# Altium PCB um982.PcbDoc
Units mm, origin at the board's own origin, x right, y up, seen from the top; angles counter-clockwise.
Board outline 39.75 x 53.34 mm, 2 copper layers (Top Layer, Bottom Layer); 39 components, 39 nets, 222 pads, 0 vias.
Unrouted connection lines stored in the file: 60.
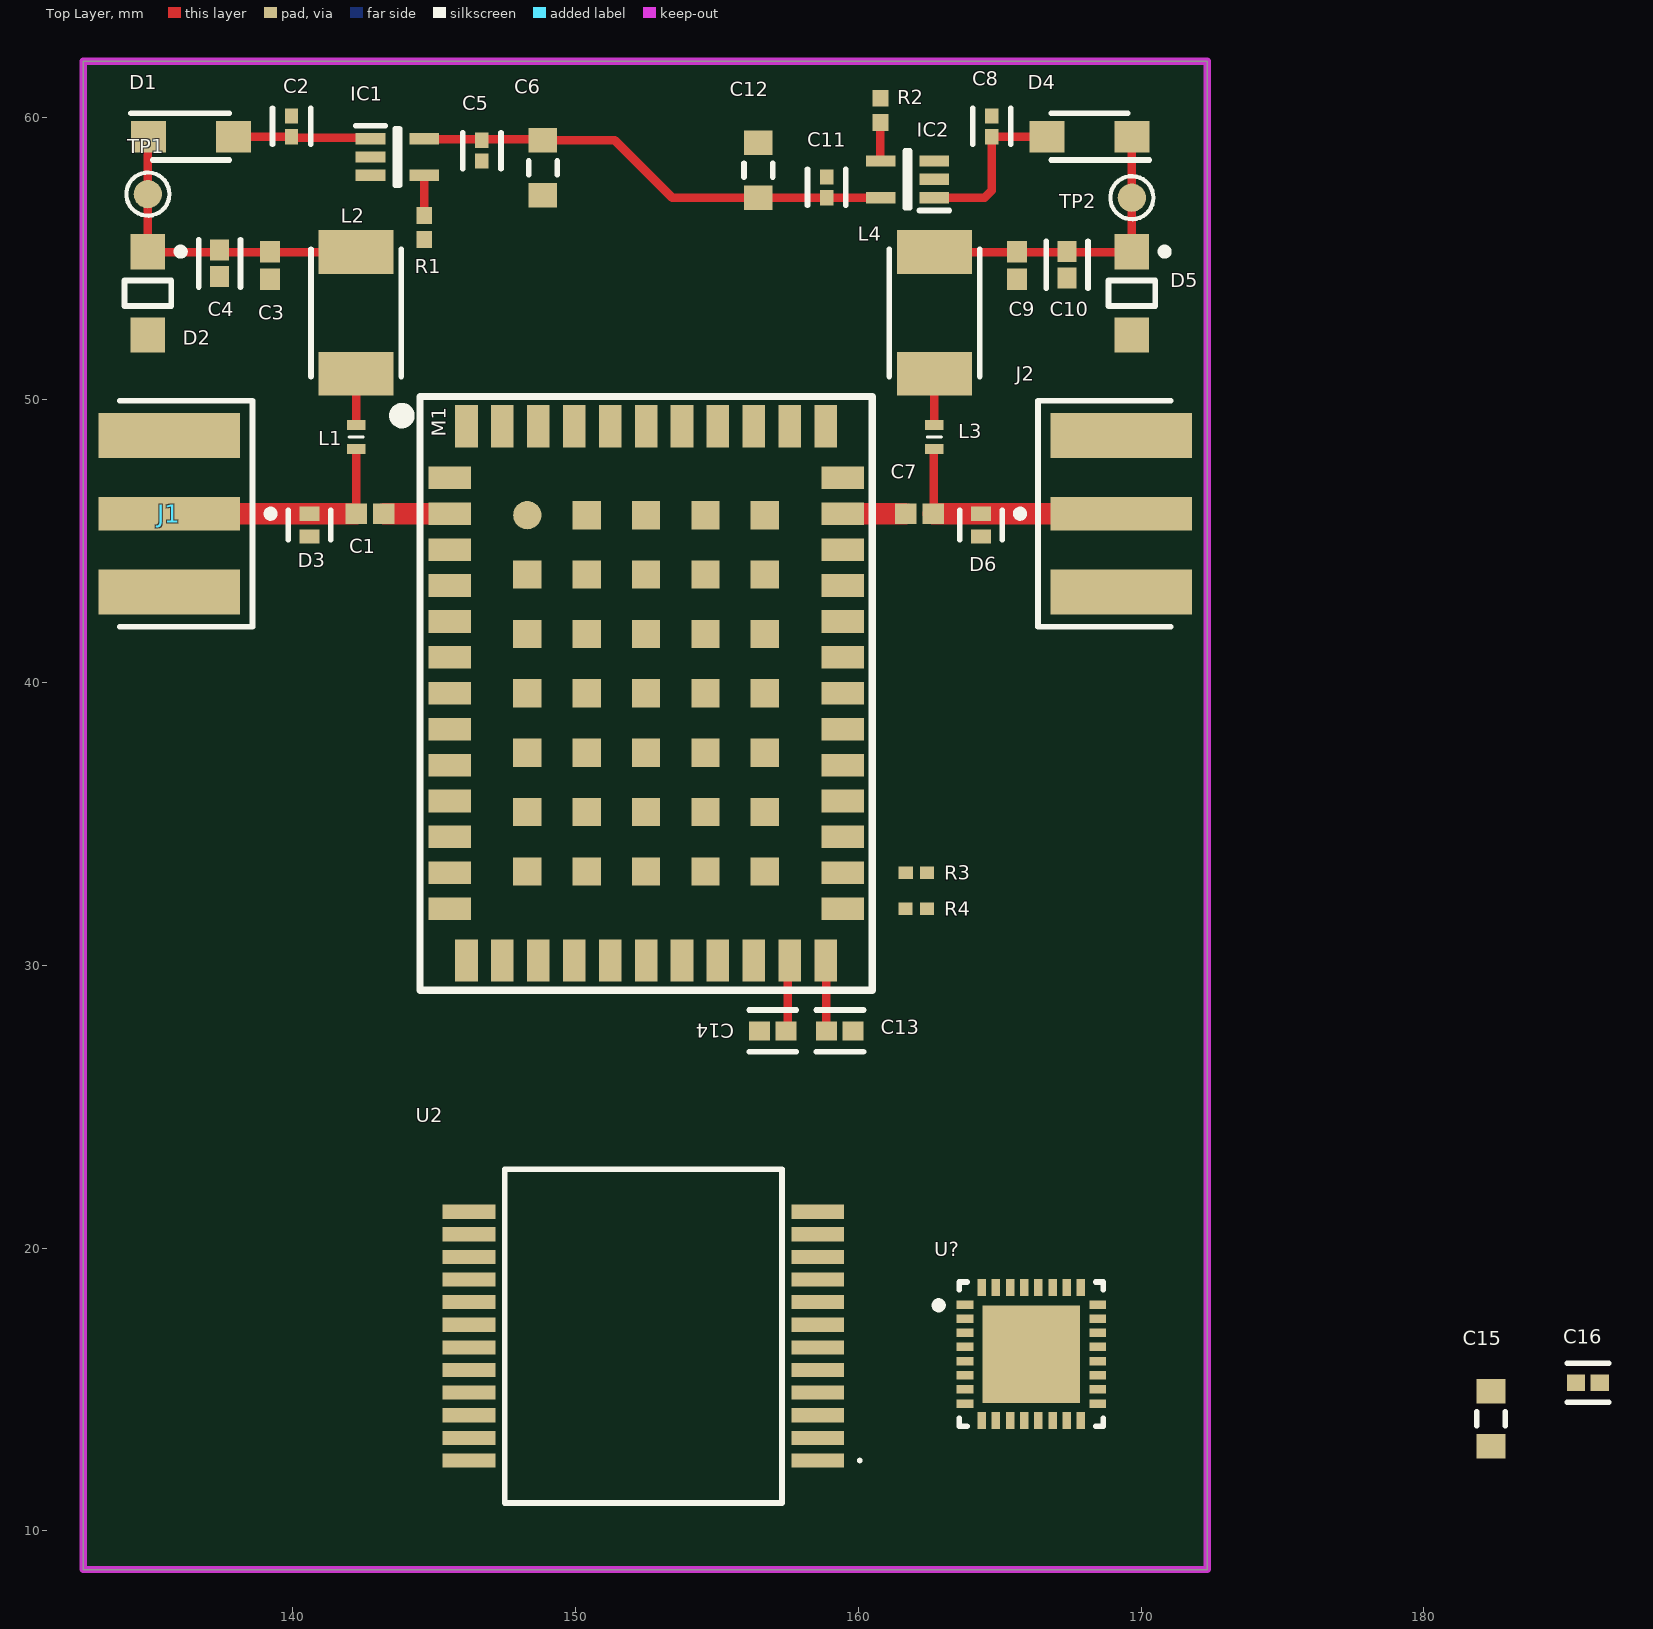
[diagram p0: Top Layer view]
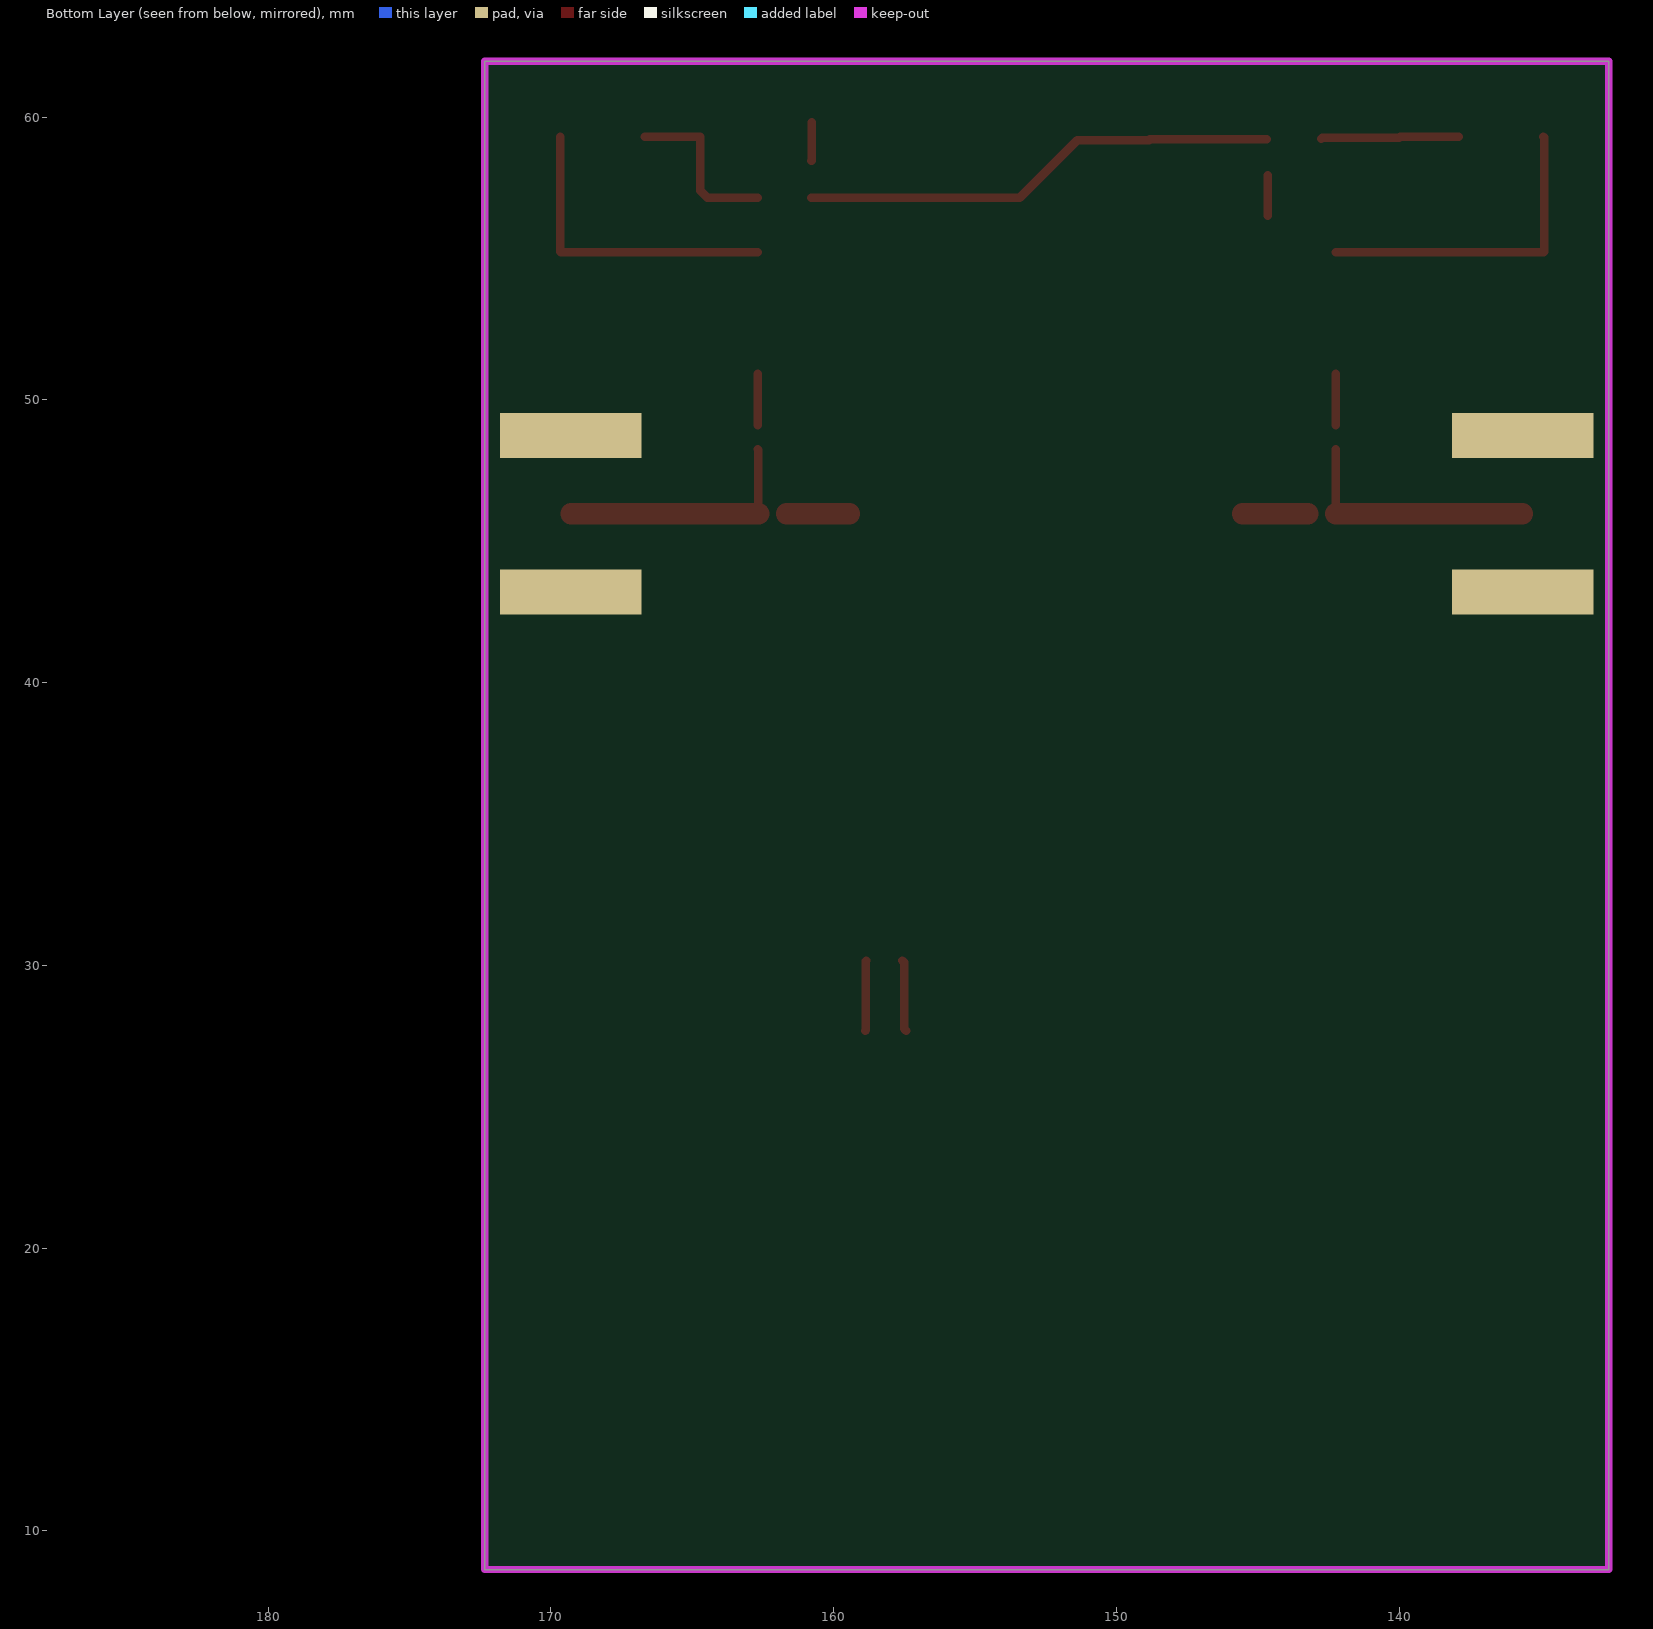
[diagram p1: Bottom Layer view, seen from below]

## Layer stack, top to bottom
Top Solder: solder mask 0.0102, Solder Resist, Dk 3.5
Top Layer: signal copper 0.0356
Dielectric 1: dielectric 0.32, FR-4, Dk 4.8
Bottom Layer: signal copper 0.0356
Bottom Solder: solder mask 0.0102, Solder Resist, Dk 3.5

## Board outline
132.588,8.636 172.339,8.636 172.339,61.976 132.588,61.976

## Design rules (kind name [scope] priority, off if disabled: settings)
Clearance [All] p1: gap=0.1 ignorepadtopadclearanceinfootprint=FALSE
PolygonConnect [All] p1: connectstyle=Relief reliefconductorwidth=0.254 reliefentries=4 polygonreliefangle="90 Angle" airgapwidth=0.254
RoutingVias [All] p1: holewidth=0.711 width=1.27 viastyle="Through Hole" minholewidth=0.711 minwidth=1.27 maxholewidth=0.711 maxwidth=1.27
SolderMaskExpansion [All] p1: expansion=0.102 istentingtop=FALSE
Width [All] p1: maxlimit=1 minlimit=0.2 preferedwidth=0.3
30 further rules are at their usual default settings.

## Classes and differential pairs
component class IMU: C15 C16 U2 U?
component class um982: C1 C2 C3 C4 C5 C6 C7 C8 C9 C10 C11 C12 C13 C14 D1 D2 D3 D4 D5 D6 IC1 IC2 J1 J2 L1 L2 L3 L4 M1 R1 R2 R3 R4 TP1 TP2

## Components (designator, comment, footprint, x,y, rotation, side; value= is the part's Value field where it differs from the comment)
C1 "GRM1555C1H101JA01D" CAPC1005X55X25ML05T10 142.73,45.974 r0 top value=100p
C2 "C1005X7R1H104K050BB" FP-C1005-050-0_05-IPC_C 139.954,59.676 r270 top value=100n
C3 "GRM1555C1H101JA01D" CAPC1005X55X25ML05T10 139.192,54.755 r270 top value=100p
C4 "C1005X7R1H104K050BB" FP-C1005-050-0_05-IPC_A 137.414,54.828 r90 top value=100n
C5 "C1005X7R1H104K050BB" FP-C1005-050-0_05-IPC_C 146.685,58.815 r90 top value=100n
C6 "C1608X5R1E106M080AC" FP-C1608-080-IPC_A 148.844,58.207 r270 top value=10u
C7 "GRM1555C1H101JA01D" CAPC1005X55X25ML05T10 162.161,45.974 r180 top value=100p
C8 "C1005X7R1H104K050BB" FP-C1005-050-0_05-IPC_C 164.719,59.676 r270 top value=100n
C9 "GRM1555C1H101JA01D" CAPC1005X55X25ML05T10 165.608,54.755 r270 top value=100p
C10 "C1005X7R1H104K050BB" FP-C1005-050-0_05-IPC_A 167.386,54.778 r90 top value=100n
C11 "C1005X7R1H104K050BB" FP-C1005-050-0_05-IPC_C 158.877,57.517 r270 top value=100n
C12 "C1608X5R1E106M080AC" FP-C1608-080-IPC_A 156.464,58.125 r90 top value=10u
C13 "C1005X7R1H104K050BB" FP-C1005-050-0_05-IPC_A 159.344,27.686 r180 top value=100n
C14 "C1005X7R1H104K050BB" FP-C1005-050-0_05-IPC_A 156.972,27.686 r0 top value=100n
C15 "C1608X5R1E106M080AC" FP-C1608-080-IPC_A 182.372,13.97 r90 top
C16 "C1005X5R1E105K050BC" FP-C1005-050-0_05-IPC_B 185.801,15.24 r0 top
D1 "MBR120LSFT1G" SODFL3616X98N 136.398,59.309 r0 top
D2 "SMF5.0AT1G" ONSC-SOD-123FL-2-498_V 134.874,53.77 r270 top
D3 "PESD5V0F1BLD,315" FP-SOD882D-MFG 140.589,45.574 r90 top
D4 "MBR120LSFT1G" SODFL3616X98N 168.172,59.309 r180 top
D5 "SMF5.0AT1G" ONSC-SOD-123FL-2-498_V 169.672,53.77 r270 top
D6 "PESD5V0F1BLD,315" FP-SOD882D-MFG 164.338,45.574 r90 top
IC1 "FPF2004" SOT65P210X110-5N 143.698,58.589 r0 top
IC2 "FPF2004" SOT65P210X110-5N 161.737,57.8 r180 top
J1 "CON-SMA-EDGE-S" FP-CON-SMA-EDGE-S-MFG 128.376,45.974 r90 top
J2 "CON-SMA-EDGE-S" FP-CON-SMA-EDGE-S-MFG 176.551,45.974 r270 top
L1 "LQG15HS68NJ02D" LQG15WH0N7B02D 142.24,48.685 r90 top value=68n
L2 "NL453232T-220J-PF" INDM4532X340N 142.24,53.077 r90 top value=22u
L3 "LQG15HS68NJ02D" LQG15WH0N7B02D 162.687,48.685 r90 top value=68n
L4 "NL453232T-220J-PF" INDM4532X340N 162.687,53.077 r90 top value=22u
M1 "UM982" UM982 144.492,29.124 r270 top
R1 "RC0402FR-075K1L" RESC1005X40X25NL05T10 144.653,56.09 r90 top value=5K1
R2 "RC0402FR-075K1L" RESC1005X40X25NL05T10 160.782,60.242 r270 top value=5K1
R3 "RC0402FR-0710KL" RESC1005X40X25LL05T10 162.052,33.274 r180 top value=10K
R4 "RC0402FR-0710KL" RESC1005X40X25LL05T10 162.046,32.004 r180 top value=10K
TP1 "Ø1.0mm,SMD" TP_SMD_Ø1.0mm 134.874,57.277 r0 top
TP2 "Ø1.0mm,SMD" TP_SMD_Ø1.0mm 169.672,57.15 r0 top
U2 "SCH16T-K01-1" SCH16TK011 152.4,16.891 r180 top
U? "STM32L432KCU6" FP-UFQFPN32-A0B8-MFG 166.116,16.256 r0 top

## Footprints (in the part's own frame and the unit in brackets; to place one, negate y for a bottom-side part, rotate by r counter-clockwise, add the part's x,y. Pads: shape width x height; smd on the part's side, far side on the other; paste and mask are expansions set on the pad)
CAPC1005X55X25ML05T10 [mm] "Chip Capacitor, 2-Leads, Body 1.00x0.50mm, IPC Low Density"
  rect 0.76x0.72 smd: 1(-0.49,0) 2(0.49,0)
  body extent -0.53,-0.28 0.53,0.27, height 0.55
FP-C1005-050-0_05-IPC_A [mm]
  rect 0.739x0.672 smd paste+0 mask+0: 1(-0.467,0) 2(0.467,0)
  silkscreen extent -0.84,-0.74 0.84,0.74, body extent -1.04,-0.54 1.04,0.54, height 0.25
FP-C1005-050-0_05-IPC_B [mm]
  rect 0.639x0.572 smd paste+0 mask+0: 1(-0.417,0) 2(0.417,0)
  silkscreen extent -0.74,-0.69 0.74,0.69, body extent -0.89,-0.44 0.89,0.44, height 0.25
FP-C1005-050-0_05-IPC_C [mm]
  rect 0.539x0.472 smd paste+0 mask+0: 1(-0.367,0) 2(0.367,0)
  silkscreen extent -0.64,-0.67 0.64,0.67, body extent -0.74,-0.38 0.74,0.38, height 0.25
FP-C1608-080-IPC_A [mm]
  rect 0.862x1.012 smd paste+0 mask+0: 1(-0.975,0) 2(0.975,0)
  silkscreen extent -0.24,-0.51 0.24,0.51, body extent -1.91,-1.01 1.91,1.01, height 0.25
FP-CON-SMA-EDGE-S-MFG [mm]
  rect 1.2x5 smd paste+0 mask+0: 1(0,-7.26)
  rect 1.6x5 smd paste+0 mask+0: 2(-2.77,-7.26) 3(2.77,-7.26)
  rect 1.6x5 smd far side paste+0 mask+0: 4(-2.77,-7.26) 5(2.77,-7.26)
  silkscreen extent -4,-10.96 4,-5.5, body extent -3.67,-9.86 3.67,4.86, height 0.25
FP-SOD882D-MFG [mm]
  rect 0.5x0.7 smd paste-1000 mask+0: 1(-0.4,0) 2(0.4,0)
  silkscreen extent -0.53,-0.75 0.53,0.75, body extent -0.75,-0.45 0.75,0.45, height 0.25
FP-UFQFPN32-A0B8-MFG [mm]
  rect 0.6x0.3 smd paste+0 mask+0: 1(-2.35,1.75) 2(-2.35,1.25) 3(-2.35,0.75) 4(-2.35,0.25) 5(-2.35,-0.25) 6(-2.35,-0.75) 7(-2.35,-1.25) 8(-2.35,-1.75) 17(2.35,-1.75) 18(2.35,-1.25) 19(2.35,-0.75) 20(2.35,-0.25) 21(2.35,0.25) 22(2.35,0.75) 23(2.35,1.25) 24(2.35,1.75)
  rect 0.3x0.6 smd paste+0 mask+0: 9(-1.75,-2.35) 10(-1.25,-2.35) 11(-0.75,-2.35) 12(-0.25,-2.35) 13(0.25,-2.35) 14(0.75,-2.35) 15(1.25,-2.35) 16(1.75,-2.35) 25(1.75,2.35) 26(1.25,2.35) 27(0.75,2.35) 28(0.25,2.35) 29(-0.25,2.35) 30(-0.75,2.35) 31(-1.25,2.35) 32(-1.75,2.35)
  rect 3.45x3.45 smd paste+0 mask+0: 33(0,0)
  silkscreen extent -3.4,-2.55 2.55,2.55, body extent -2.75,-2.75 2.75,2.75, height 0.25
INDM4532X340N [mm]
  rect 1.55x2.65 smd: 1(-2.15,0) 2(2.15,0)
  silkscreen extent -2.25,-1.6 2.25,1.6, body extent -2.25,-1.6 2.25,1.6, height 3.4
LQG15WH0N7B02D [mm]
  rect 0.35x0.65 smd: 1(-0.425,0) 2(0.425,0)
  silkscreen extent 0,-0.25 0,0.25, body extent -0.5,-0.25 0.5,0.25, height 0.55
ONSC-SOD-123FL-2-498_V [mm] "SOD, 2-Leads, Body 2.7x1.65mm"
  rect 1.25x1.22 smd: 1(-1.475,0) 2(1.475,0)
  silkscreen extent -1.6,-0.82 0.45,1.29, body extent -1.35,-0.82 1.35,0.82, height 0.98
RESC1005X40X25LL05T10 [mm] "Chip Resistor, 2-Leads, Body 1.00x0.50mm, IPC High Density"
  rect 0.5x0.45 smd: 1(-0.375,0) 2(0.375,0)
  body extent -0.53,-0.27 0.53,0.28, height 0.4
RESC1005X40X25NL05T10 [mm] "Chip Resistor, 2-Leads, Body 1.00x0.50mm, IPC Medium Density"
  rect 0.6x0.55 smd: 1(-0.425,0) 2(0.425,0)
  body extent -0.53,-0.27 0.53,0.28, height 0.4
SCH16TK011 [mm]
  rect 1.87x0.5 smd: 1(-6.165,4.4) 2(-6.165,3.6) 3(-6.165,2.8) 4(-6.165,2) 5(-6.165,1.2) 6(-6.165,0.4) 7(-6.165,-0.4) 8(-6.165,-1.2) 9(-6.165,-2) 10(-6.165,-2.8) 11(-6.165,-3.6) 12(-6.165,-4.4) 13(6.165,-4.4) 14(6.165,-3.6) 15(6.165,-2.8) 16(6.165,-2) 17(6.165,-1.2) 18(6.165,-0.4) 19(6.165,0.4) 20(6.165,1.2) 21(6.165,2) 22(6.165,2.8) 23(6.165,3.6) 24(6.165,4.4)
  silkscreen extent -7.7,-5.9 4.9,5.9, body extent -6.6,-5.9 6.6,5.9, height 2.86
SODFL3616X98N [mm]
  rect 1.24x1.12 smd: 1(-1.5,0) 2(1.5,0)
  silkscreen extent -2.12,-0.82 1.35,0.82, body extent -1.8,-0.82 1.8,0.82, height 0.98
SOT65P210X110-5N [mm]
  rect 1.05x0.4 smd: 1(-0.95,0.65) 2(-0.95,0) 3(-0.95,-0.65) 4(0.95,-0.65) 5(0.95,0.65)
  silkscreen extent -1.48,-1 0.08,1.1, body extent -1.05,-1 1.05,1, height 1.1
TP_SMD_Ø1.0mm [mm]
  round 1 smd paste-5: 1(0,0)
  silkscreen extent -0.76,-0.76 0.76,0.76
UM982 [mm]
  rect 1x1 smd: 0(-16.8,8) 0(-16.8,10.1) 0(-16.8,12.2) 0(-16.8,5.9) 0(-14.7,8) 0(-14.7,10.1) 0(-14.7,12.2) 0(-14.7,3.8) 0(-14.7,5.9) 0(-12.6,12.2) 0(-12.6,5.9) 0(-12.6,8) 0(-12.6,10.1) 0(-12.6,3.8) 0(-10.5,12.2) 0(-10.5,5.9) 0(-10.5,8) 0(-10.5,10.1) 0(-10.5,3.8) 0(-8.4,12.2) 0(-8.4,5.9) 0(-8.4,8) 0(-8.4,10.1) 0(-8.4,3.8) 0(-6.3,10.1) 0(-6.3,12.2) 0(-6.3,5.9) 0(-6.3,8) 0(-6.3,3.8) 0(-4.2,10.1) 0(-4.2,12.2) 0(-4.2,5.9) 0(-4.2,8) 0(-4.2,3.8)
  round 1 smd: 0(-16.8,3.8)
  rect 0.8x1.5 smd: 1(-18.12,1.05) 2(-16.85,1.05) 3(-15.58,1.05) 4(-14.31,1.05) 5(-13.04,1.05) 6(-11.77,1.05) 7(-10.5,1.05) 8(-9.23,1.05) 9(-7.96,1.05) 10(-6.69,1.05) 11(-5.42,1.05) 12(-4.15,1.05) 13(-2.88,1.05) 25(-2.88,14.95) 26(-4.15,14.95) 27(-5.42,14.95) 28(-6.69,14.95) 29(-7.96,14.95) 30(-9.23,14.95) 31(-10.5,14.95) 32(-11.77,14.95) 33(-13.04,14.95) 34(-14.31,14.95) 35(-15.58,14.95) 36(-16.85,14.95) 37(-18.12,14.95)
  rect 1.5x0.8 smd: 14(-1.05,1.65) 15(-1.05,2.92) 16(-1.05,4.19) 17(-1.05,5.46) 18(-1.05,6.73) 19(-1.05,8) 20(-1.05,9.27) 21(-1.05,10.54) 22(-1.05,11.81) 23(-1.05,13.08) 24(-1.05,14.35) 38(-19.95,14.35) 39(-19.95,13.08) 40(-19.95,11.81) 41(-19.95,10.54) 42(-19.95,9.27) 43(-19.95,8) 44(-19.95,6.73) 45(-19.95,5.46) 46(-19.95,4.19) 47(-19.95,2.92) 48(-19.95,1.65)
  silkscreen extent -21,-0.83 0,16, body extent -20.96,0 0.04,16, height 2.6

## Part data
C1 C3 C7 C9: library part CMP-2008-03915-1, Manufacturer=Murata, Part Number=GRM1555C1H101JA01D
C2 C4 C5 C8 C10 C11 C13 C14: library part CMP-2000-05393-2, "Multilayer Ceramic Capacitors 100nF ±10% 50V X7R SMD 0402", Capacitance=100nF, Case Code (Imperial)=0402, Case Code (Metric)=1005, Dielectric=X7R, Dielectric Material=Ceramic, Max Operating Temperature=125°C, Min Operating Temperature=-55°C, Package Quantity=1, Tolerance=10%, Voltage=50V, Case/Package=0402, Construction=Flat, Depth=0.5mm, Height=0.5mm, Lead Free="Lead Free", Length=1mm, Mount="Surface Mount", Packaging="Tape and Reel", Radiation Hardening=No, REACH SVHC="No SVHC", Resistor Type=Ceramic, RoHS Compliant=Yes, Series=C, Termination=SMD/SMT, Thickness=0.022inch, Voltage Rating=50V, Voltage Rating (DC)=50V, Weight=2.3E-05oz, Width=0.02inch
C6 C12 C15: library part CMP-2000-05442-2, "CAP CER 10UF 25V X5R 0603", Capacitance=10uF, Case Code (Imperial)=0603, Case Code (Metric)=1608, Dielectric=X5R, Dielectric Material=Ceramic, Max Operating Temperature=85°C, Min Operating Temperature=-55°C, Package Quantity=1, Tolerance=20%, Voltage Rating=25V, Case/Package=0603, Construction=Flat, Depth=0.8mm, Height=0.8mm, Lead Free="Lead Free", Length=1.6mm, Mount="Surface Mount", Packaging="Tape and Reel", REACH SVHC="No SVHC", Resistor Type=Ceramic, RoHS Compliant=Yes, Series=C, Termination=SMD/SMT, Thickness=0.039inch, Voltage Rating (DC)=25V, Weight=7.1E-05oz, Width=0.8mm
C16: library part CMP-2000-06001-2, "Multilayer Ceramic Capacitors 1μF ±10% 25V X5R SMD 0402", Capacitance=1uF, Case Code (Imperial)=0402, Case Code (Metric)=1005, Dielectric=X5R, Dielectric Material=Ceramic, Max Operating Temperature=85°C, Min Operating Temperature=-55°C, Package Quantity=1, Tolerance=10%, Voltage Rating=25V, Case/Package=0402, Depth=0.5mm, Height=0.5mm, Lead Free="Lead Free", Length=1mm, Mount="Surface Mount", Packaging="Tape and Reel", Radiation Hardening=No, REACH SVHC="No SVHC", Resistor Type=Ceramic, RoHS Compliant=Yes, Series=C, Termination=SMD/SMT, Thickness=0.022inch, Voltage Rating (DC)=25V, Weight=2.3E-05oz, Width=0.02inch
D1 D4: "Diode", Manufacturer_Name=onsemi, Mouser Part Number=863-MBR120LSFT1G, Arrow Part Number=MBR120LSFT1G, Arrow Price/Stock=https://www.arrow.com/en/products/mbr120lsft1g/on-semiconductor?utm_currency=USD&region=nac, Datasheet Link=https://www.onsemi.com/pub/Collateral/MBR120LSFT1-D.PDF, Height=0.98mm, Manufacturer_Part_Number=MBR120LSFT1G, Mouser Price/Stock=https://www.mouser.co.uk/ProductDetail/onsemi/MBR120LSFT1G?qs=3JMERSakebpX1t8rvRkaxg%3D%3D
D2 D5: library part CMP-1061-00612-1, "200 W Transient Voltage Suppressor, 2-Pin SOD-123FL, Pb-Free, Tape and Reel", Manufacturer="On Semiconductor", ComponentLink1Description="Manufacturer URL", ComponentLink1URL=http://www.onsemi.com/, ComponentLink2Description=Datasheet, ComponentLink2URL=http://www.onsemi.com/pub_link/Collateral/SMF5.0AT1-D.PDF, ComponentLink3Description="Package Specification", ComponentLink3URL=http://www.onsemi.com/pub_link/Collateral/498-01.PDF, DatasheetVersion="Rev. 7", Direction=Unidirectional, IR Max (uA)=400, Mounting Technology="Surface Mount", PackageDescription="2-Pin SOD, Body 1.65 x 2.7 mm", PackageReference=SOD-123FL-2-498, PackageVersion="Rev. D, 05/2013", Packing="Tape and Reel", PartNumber=SMF5.0AT1G, RoHS=Pb-Free, V(BR) Typ (V)=6.7
D3 D6: library part CMP-14432-000003-1, "TVS DIODE 5.5V 15V 2DFN1006D", RoHS Compliant=Yes
IC1 IC2: "Integrated Circuit", Manufacturer_Name=onsemi, Mouser Part Number=512-FPF2004, Arrow Part Number=FPF2004, Arrow Price/Stock=https://www.arrow.com/en/products/fpf2004/on-semiconductor, Datasheet Link=https://www.onsemi.com/pub/Collateral/FPF2001-D.PDF, Height=1.1mm, Manufacturer_Part_Number=FPF2004, Mouser Price/Stock=https://www.mouser.co.uk/ProductDetail/onsemi-Fairchild/FPF2004?qs=lYuAOLy5nvYlXtSUPYB80A%3D%3D
J1 J2: library part CMP-204357-000001-1, "CONN SMA JACK STR EDGE MNT", Frequency=18GHz, Manufacturer="RF Solutions Ltd.", Package=CONN_JACK, Automotive=No, Category=Conn, ComponentLink2Description=Datasheet, ComponentLink2URL=https://www.rfsolutions.co.uk/downloads/1498648656DS-CON-EDGE-SMA-4.pdf, Conn Orientation="Right Angle", Contact Material=Gold, Device Class L1=Connectors, Device Class L2="RF / Coaxial Connectors", Device Class L3=unset, Digikey Description="CONN SMA JACK STR EDGE MNT", Footprint Url=https://forum.upverter.com/uploads/default/original/3X/b/e/be75b907af57498775929d6d9099689c472e0307.pdf, Height=6.35mm, Impedance=50Ω, Is Female=yes, Lead Free=Yes, Manufacturer Part Number=CON-SMA-EDGE-S, Number Of Contacts=1, Octopart=https://octopart.com/con-sma-edge-s-rf+solutions-70967450, RoHS=TRUE, Shielding=true
L1 L3: "Inductor", Manufacturer_Name="Murata Electronics", Mouser Part Number=81-LQG15HS68NJ02D, Arrow Part Number=LQG15HS68NJ02D, Arrow Price/Stock=https://www.arrow.com/en/products/lqg15hs68nj02d/murata-manufacturing?region=nac, Datasheet Link=https://search.murata.co.jp/Ceramy/image/img/P02/JELF243B-0010.pdf, Height=0.6mm, Manufacturer_Part_Number=LQG15HS68NJ02D, Mouser Price/Stock=https://www.mouser.co.uk/ProductDetail/Murata-Electronics/LQG15HS68NJ02D?qs=%252BvdzeT3otYvc8aHGlFkb4Q%3D%3D
L2 L4: "Inductor", Manufacturer_Name=TDK, Mouser Part Number=810-NL453232T-220JPF, Arrow Part Number=NL453232T-220J-PF, Arrow Price/Stock=https://www.arrow.com/en/products/nl453232t-220j-pf/tdk, Datasheet Link=https://product.tdk.com/system/files/dam/doc/product/inductor/inductor/smd/catalog/inductor_commercial_standard_nl453232_en.pdf, Height=3.4mm, Manufacturer_Part_Number=NL453232T-220J-PF, Mouser Price/Stock=https://www.mouser.co.uk/ProductDetail/TDK/NL453232T-220J-PF?qs=qikLf3I1oVVds9cZ5k413A%3D%3D
M1: "All-constellation Multi-frequencyHigh Precision Positioning & Heading Module"
R1 R2: library part CMP-2002-07753-1, Manufacturer="Yageo / Phycomp", Part Number=RC0402FR-075K1L
R3 R4: library part CMP-2002-07353-1, Manufacturer="Yageo / Phycomp", Part Number=RC0402FR-0710KL
TP1 TP2: library part TP_SMD_Ø1.0MM, "1.0mm circular SMD testpad", Manufacturer="Nordic Semiconductor", Manufacturer Part Number=N.A., Artikkelnr Noca=N.A., Component Class=Connectors, ComponentLink1Description=Datasheet, ComponentLink1URL=N.A., ComponentLink2Description="Supplier link", ComponentLink2URL=N.A., Footprint Doc=TP_SMD_Ø1.0mm, HelpURL=N.A., LatestRevisionDate=2013-06-11, Note=N.A., Pad Count=1, Part Number=TP_SMD_Ø1.0MM, Part number IPS=N.A., PartId=100500475, Published=2013-06-11, Supplier 1=N.A., Supplier 2=N.A., Supplier Part Number 1=N.A., Supplier Part Number 2=N.A.
U2: "Undefined or Miscellaneous", Manufacturer_Name="Murata Electronics", Mouser Part Number=81-SCH16T-K01-1, Arrow Part Number=SCH16T-K01-1, Arrow Price/Stock=https://www.arrow.com/en/products/sch16t-k01-1/murata-manufacturing?utm_currency=USD&region=nac, Datasheet Link=https://www.murata.com/-/media/webrenewal/products/sensor/pdf/datasheet/datasheet-sch16t-series-short.ashx?la=en-us&cvid=20240110024121000000, Height=3mm, Manufacturer_Part_Number=SCH16T-K01-1, Mouser Price/Stock=https://www.mouser.co.uk/ProductDetail/Murata-Electronics/SCH16T-K01-1?qs=HFfMDpzxxd0hctvcENbFhg%3D%3D
U?: library part CMP-12105-000033-1, "IC MCU 32BIT 256KB FLASH 32QFPN", Ambient Temperature Range High=+85°C, Ambient Temperature Range Low=-40°C, Frequency=80MHz, Manufacturer=STMicroelectronics, Max Junction Temp=+105°C, Max Supply Voltage=3.6V, Min Supply Voltage=1.62V, Package=UFQFPN32-A0B8, Temperature="-40°C to +105°C", Automotive=No, Category=IC, ComponentLink2Description=Datasheet, ComponentLink2URL=https://www.st.com/content/ccc/resource/technical/document/datasheet/24/01/9f/59/f0/83/47/fc/DM00257205.pdf/files/DM00257205.pdf/jcr:content/translations/en.DM00257205.pdf, Core Architecture="ARM Cortex-M4", Data Bus Width=32bits, Device Class L1="Integrated Circuits (ICs)", Device Class L2="Embedded Processors and Controllers", Device Class L3=Microcontrollers, Digikey Description="IC MCU 32BIT 256KB FLASH 32QFPN", Height=0.6mm, Interface=I2C,SPI,UART,USART,CAN,USB,LIN,IrDA,Other, Lead Free=Yes, Manufacturer Part Number=STM32L432KCU6, Memory Size=256KBytes, Memory Type=FLASH, Number Of A/D Converters=1, Number Of Adc Channels=11, Number Of Cores=1, Number Of I2C Channels=2, Number Of I/Os=26, Number Of Pwm Channels=1, Number Of Spi Channels=2, Number Of Timers/Counters=11, Number Of Uart Channels=3, Number Of Usb Channels=1, Octopart=https://octopart.com/stm32l432kcu6-stmicroelectronics-71093510, Ram Size=64KBytes, RoHS=TRUE, Temperature Range High=+105°C, Temperature Range Low=-40°C

## Nets (pads, with @x,y where several pads share a name; then routed paths per layer and width w, separated by ;. In a path a pad name is that pad's centre, name@x,y a point inside that pad or via, vN(x,y) a via of type N, cw(c..) or ccw(c..) an arc to the next point about the centre after c; other vN are vias at no path point)
+3V3: C13.2 C14.2 M1.23 M1.24 R1.1 R2.1 R3.1 R4.1 U2.8 U2.17 U2.18 | length 5
  Top Layer w0.3: C14.2 157.505,27.753 157.505,30.107 M1.23 ; M1.24 158.859,30.157 158.859,27.704 C13.2
+5: C5.2 C6.1 C11.2 C12.1 IC1.5 IC2.5 | length 17
  Top Layer w0.3: IC1.5@144.677,59.211 148.815,59.211 C6.1 151.384,59.182 153.416,57.15 C12.1 C11.2 IC2.5
ANT1_BIAS: C2.2 D1.2 IC1.1 | length 4.9
  Top Layer w0.3: D1.2 C2.2 139.989,59.274 142.713,59.274 IC1.1
ANT1_FLT: IC1.3
ANT1_IN: C1.2 M1.2 | length 2.3
  Top Layer w0.75: C1.2 M1.2
ANT2_BIAS: C8.2 D4.2 IC2.1 | length 6
  Top Layer w0.3: IC2.1 164.465,57.15 164.719,57.404 C8.2 D4.2
ANT2_FLT: IC2.3
ANT2_IN: C7.2 M1.36 | length 2.2
  Top Layer w0.75: M1.36 C7.2
CS: U2.22
DRY: U2.20
ERR_STAT: M1.14
EVENT: M1.32
EXTRESN: U2.6
GND: C2.1 C3.2 C4.1 C5.1 C6.2 C8.1 C9.2 C10.1 C11.1 C12.2 C13.1 C14.1 C15.1 C16.1 D2.2 D3.1 D5.2 D6.1 IC1.2 IC2.2 J1.2 J1.3 J1.4 J1.5 J2.2 J2.3 J2.4 J2.5 M1.1 M1.3 M1.4 M1.34 M1.35 M1.37 M1.41 M1.43 M1.45 U2.1 U2.3 U2.4 U2.5 U2.7 U2.9 U2.12 U2.13 U2.16 U2.24
MISO: U2.19
MOSI: U2.23
NetC1_1: C1.1 D3.2 J1.1 L1.1 | length 8.9
  Top Layer w0.3: C1.1 L1.1
  Top Layer w0.75: J1.1 D3.2 C1.1
NetC3_1: C3.1 C4.2 D1.1 D2.1 L2.2 TP1.1 | length 11.4
  Top Layer w0.3: D1.1 134.874,59.285 TP1.1 D2.1 134.892,55.227 L2.2
NetC7_1: C7.1 D6.2 J2.1 L3.1 | length 8.9
  Top Layer w0.3: C7.1 162.669,45.992 162.669,48.242 L3.1
  Top Layer w0.75: C7.1 D6.2 J2.1
NetC9_1: C9.1 C10.2 D4.1 D5.1 L4.2 TP2.1 | length 11.1
  Top Layer w0.3: L4.2 169.654,55.227 D5.1 TP2.1 D4.1
NetC15_2: C15.2 U2.10 U2.11
NetC16_2: C16.2 U2.14 U2.15
NetIC1_4: IC1.4 R1.2 | length 1.4
  Top Layer w0.3: IC1.4 144.653,57.934 R1.2
NetIC2_4: IC2.4 R2.2 | length 1.4
  Top Layer w0.3: R2.2 160.782,58.455 IC2.4
NetL1_2: L1.2 L2.1 | length 1.8
  Top Layer w0.3: L1.2 L2.1
NetL3_2: L3.2 L4.1 | length 1.8
  Top Layer w0.3: L3.2 L4.1
NetM1_25: M1.25 R4.2
NetM1_26: M1.26 R3.2
PPS: M1.30
PVT_STAT: M1.15
RST: M1.33
RTK_STAT: M1.16
RXD1: M1.18
RXD2: M1.20
RXD3: M1.28
SCK: U2.21
TXD1: M1.17
TXD2: M1.19
TXD3: M1.27
pads on no net: M1.0 M1.5 M1.6 M1.7 M1.8 M1.9 M1.10 M1.11 M1.12 M1.13 M1.21 M1.22 M1.29 M1.31 M1.38 M1.39 M1.40 M1.42 M1.44 M1.46 M1.47 M1.48 U2.2 U?.1 U?.2 U?.3 U?.4 U?.5 U?.6 U?.7 U?.8 U?.9 U?.10 U?.11 U?.12 U?.13 U?.14 U?.15 U?.16 U?.17 U?.18 U?.19 U?.20 U?.21 U?.22 U?.23 U?.24 U?.25 U?.26 U?.27 U?.28 U?.29 U?.30 U?.31 U?.32 U?.33

## Keep-outs
Keep-Out Layer:
  the board outline again, w0.254